# Altium PCB DIOT_Sampler.PCBDOC (part 4 of 8)
Units mm, origin at the board's own origin, x right, y up, seen from the top; angles counter-clockwise.
Board outline 221.17 x 100 mm, 4 copper layers (Top, GP1(GND), L3, Bot), stack 1.648 mm thick; 666 components, 413 nets, 2132 pads, 925 vias.
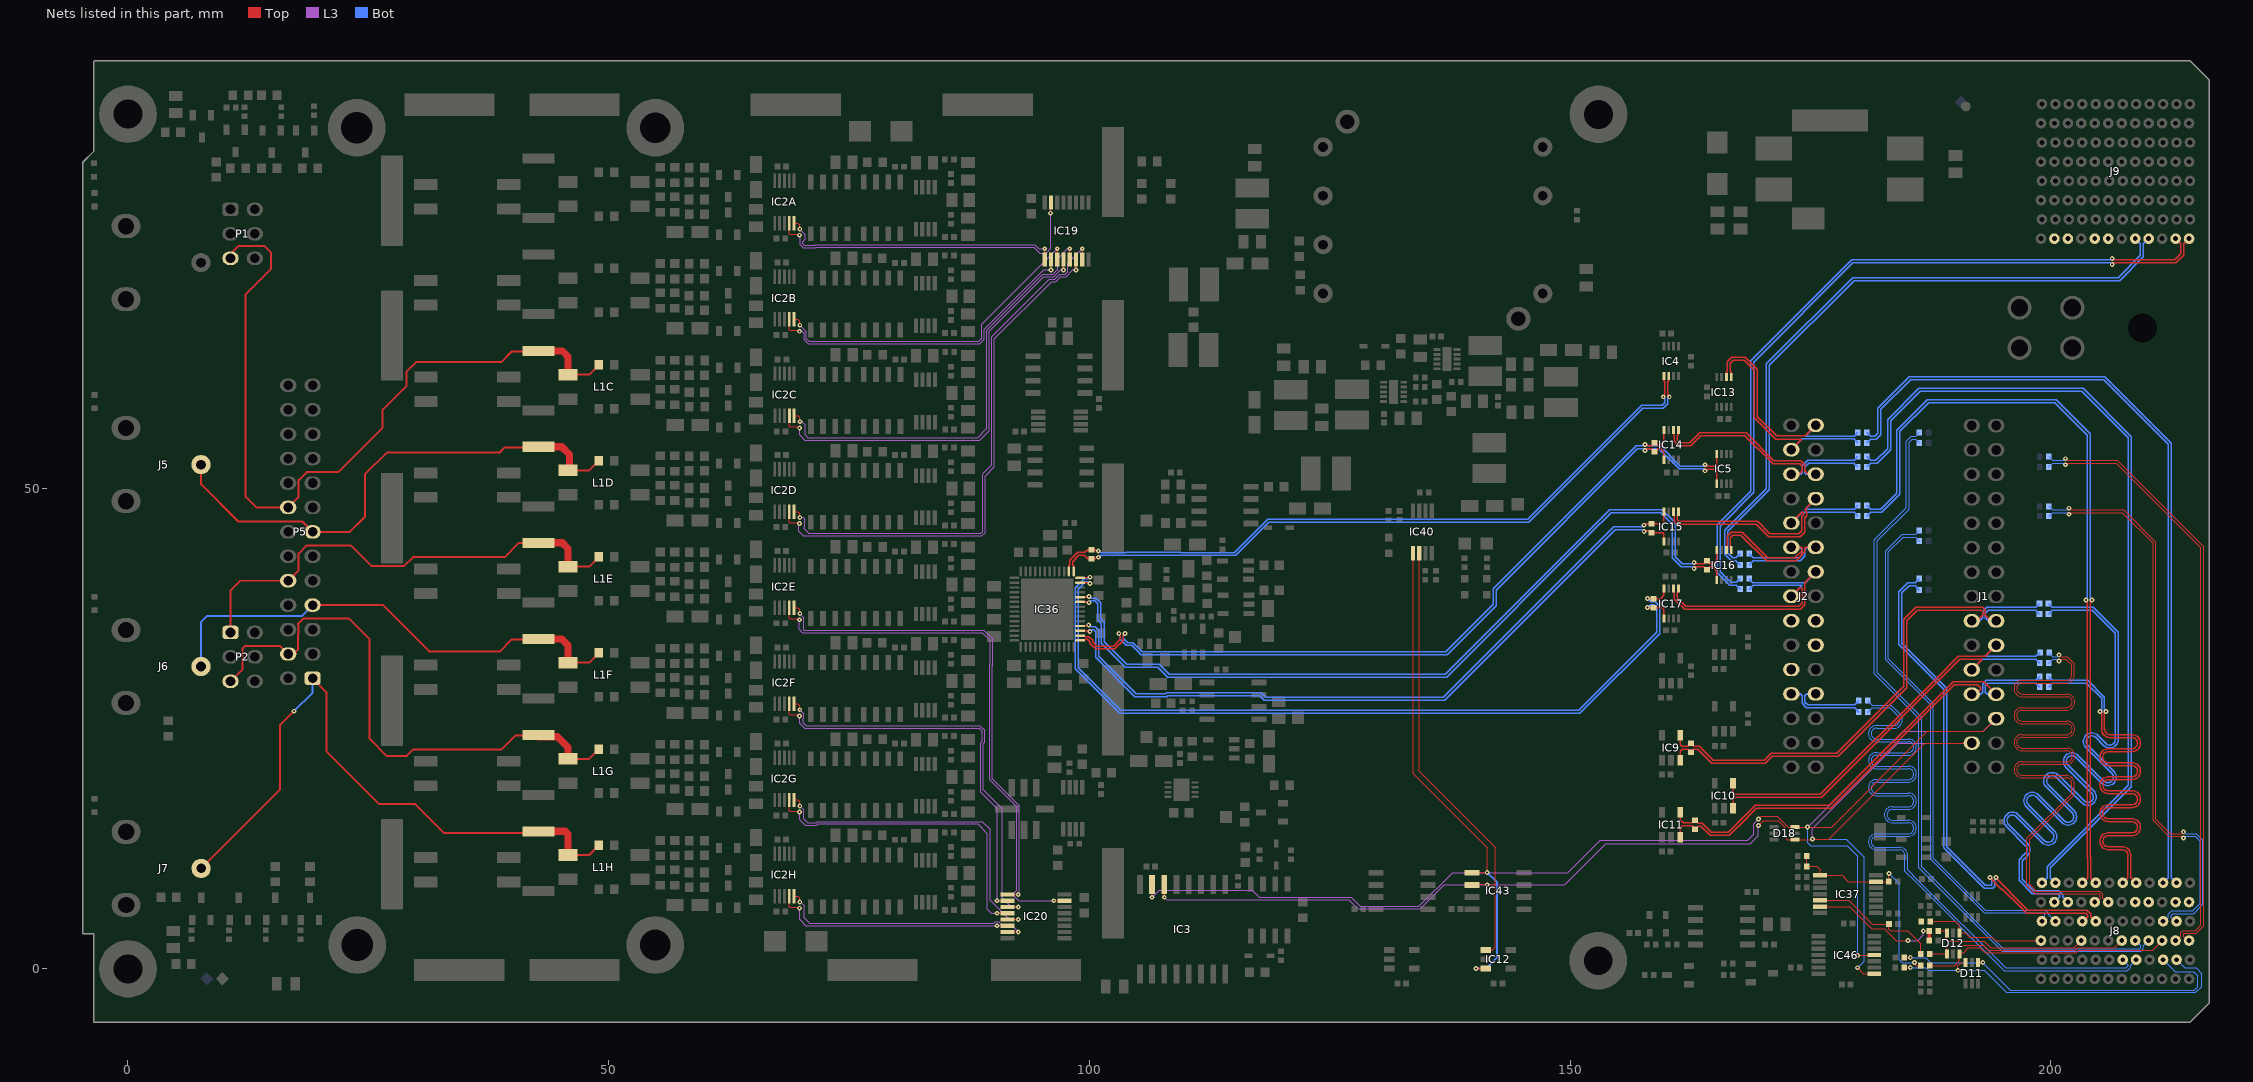
[diagram p5: the nets of this part, all layers, seen from the top]

## Via types
v1: diameter 0.5, hole 0.2, Top to Bot, tented both sides, 704 vias
v2: diameter 0.5, hole 0.2, Top to Bot, 180 vias
v3: diameter 0.6, hole 0.3, Top to Bot, tented both sides, 17 vias
v4: diameter 1, hole 0.6, Top to Bot, tented both sides, 16 vias
v5: diameter 0.6, hole 0.3, Top to Bot, 6 vias
v6: diameter 1.27, hole 0.711, Top to Bot, 2 vias

## Nets (pads, with @x,y where several pads share a name; then routed paths per layer and width w, separated by ;. In a path a pad name is that pad's centre, name@x,y a point inside that pad or via, vN(x,y) a via of type N, cw(c..) or ccw(c..) an arc to the next point about the centre after c; other vN are vias at no path point) (continued)
ADC_IN_P2: L1C.1 P1.5 P5.16 R1C.1 R5C.2 | length 81.8
  Top w0.203: P1.5@10.66,73.91 10.66,74.326 11.534,75.2 14.187,75.2 14.894,74.493 14.894,72.815 12.244,70.165 12.244,49.1 13.354,47.99 P5.16@16.66,47.99 ; P5.16@17.225,47.99 P5.16@16.66,47.99 ; R5C.2@42.707,64.261 42.665,64.219 42.654,64.23 39.944,64.23 38.819,63.105 29.974,63.105 28.958,62.089 28.958,60.619 26.494,58.155 26.494,56.261 21.894,51.661 19.783,51.661 18.576,51.661 17.76,50.845 17.76,49.09 P5.16@16.66,47.99 ; L1C.1@45.773,61.8 47.973,61.8 48.86,62.686 48.86,62.699 R1C.1@48.977,62.816
  Top w0.762: R5C.2@42.707,64.261 45.188,64.261 45.769,63.68 45.769,61.804 L1C.1@45.773,61.8
ADC_IN_P3: J5.1 L1D.1 P5.13 R1D.1 R5D.2 | length 54.4
  Top w0.203: J5.1@7.6,52.45 7.6,50.395 11.445,46.55 18.1,46.55 P5.13@19.2,45.45 23.089,45.45 24.638,46.999 24.638,51.424 26.944,53.73 38.694,53.73 39.194,54.23 42.619,54.23 R5D.2@42.694,54.305 ; L1D.1@45.76,51.844 47.961,51.844 48.847,52.73 48.847,52.743 R1D.1@48.964,52.86
  Top w0.762: R5D.2@42.694,54.305 45.119,54.305 45.919,53.505 45.919,52.003 L1D.1@45.76,51.844
ADC_IN_P4: L1E.1 P2.1 P5.10 R1E.1 R5E.2 | length 50.1
  Top w0.203: P2.1@10.66,34.99 10.66,39.336 11.694,40.37 15.23,40.37 P5.10@16.66,40.37 17.739,41.449 17.739,43.2 18.559,44.02 23.22,44.02 25.32,41.92 28.733,41.92 29.649,42.836 39.175,42.836 40.644,44.305 42.61,44.305 42.652,44.263 R5E.2@42.694,44.305 ; L1E.1@45.76,41.844 47.961,41.844 48.847,42.73 48.847,42.743 R1E.1@48.964,42.86
  Top w0.762: R5E.2@42.694,44.305 45.169,44.305 45.76,43.714 L1E.1@45.76,41.844
ADC_IN_P5: J6.1 L1F.1 P5.7 R1F.1 R5F.2 | length 51.8
  Top w0.203: P5.7@19.2,37.83 20.63,37.83 26.536,37.83 31.316,33.05 31.316,33.008 38.647,33.008 39.902,34.263 42.652,34.263 R5F.2@42.694,34.305 ; L1F.1@45.76,31.844 47.961,31.844 48.847,32.73 48.847,32.743 R1F.1@48.964,32.86
  Top w0.762: R5F.2@42.694,34.305 45.119,34.305 45.76,33.664 L1F.1@45.76,31.844
  Bot w0.203: J6.1@7.6,31.45 7.6,36.1 8.2,36.7 18.07,36.7 P5.7@19.2,37.83
ADC_IN_P6: L1G.1 P2.5 P5.4 R1G.1 R5G.2 | length 59.6
  Top w0.203: P2.5@10.66,29.91 11.93,31.18 11.93,33.335 12.17,33.575 15.835,33.575 P5.4@16.66,32.75 17.2,32.75 17.7,33.25 17.7,34.84 17.714,34.854 17.714,35.726 17.7,35.74 17.7,35.9 18.22,36.42 23,36.42 25.13,34.29 25.13,23.919 26.916,22.133 28.946,22.133 29.649,22.836 38.875,22.836 40.319,24.28 42.669,24.28 R5G.2@42.694,24.305 ; L1G.1@45.894,21.844 47.961,21.844 48.847,22.73 48.847,22.743 R1G.1@48.964,22.86
  Top w0.762: R5G.2@42.669,24.142 44.679,24.142 45.76,23.061 45.76,21.978 45.894,21.844 L1G.1@45.76,21.844
ADC_IN_P7: J7.1 L1H.1 P5.1 R1H.1 R5H.2 | length 67.3
  Top w0.203: J7.1@7.605,10.45 15.83,18.675 15.83,25.37 v2(17.26,26.8) ; P5.1@19.2,30.21 20.63,28.78 20.63,22.619 26.119,17.13 29.886,17.13 32.861,14.155 R5H.2@42.694,14.155 ; L1H.1@45.76,11.844 47.961,11.844 48.847,12.73 48.847,12.743 R1H.1@48.964,12.86
  Top w0.762: R5H.2@42.694,14.305 45.469,14.305 45.769,14.005 45.769,11.853 L1H.1@45.76,11.844
  Bot w0.203: v2(17.26,26.8) 19.2,28.74 P5.1@19.2,30.21
ADC_SCK_N: IC4.5 IC36.42 R79.1 | length 73.1
  Top w0.152: IC36.42@97.864,41.34 97.864,41.942 97.962,42.039 97.962,42.492 98.778,43.308 99.516,43.308 99.808,43.6 R79.1@100.194,43.6 100.58,43.6 100.711,43.469 v1(100.917,43.469) ; v2(159.686,59.5) 159.847,59.661 159.847,61.051 159.75,61.149 IC4.5@159.75,61.65
  Bot w0.152: v1(100.917,43.469) 101.011,43.469 101.174,43.306 103.759,43.306 103.78,43.327 109.522,43.327 109.544,43.306 115.086,43.306 118.53,46.75 145.575,46.75 157.45,58.625 159.572,58.625 159.847,58.9 159.847,59.339 v2(159.686,59.5)
ADC_SCK_P: IC4.6 IC36.41 R79.2 | length 73.1
  Top w0.152: IC36.41@98.364,41.34 98.364,41.942 98.266,42.039 98.266,42.365 98.904,43.003 99.465,43.003 99.808,42.66 R79.2@100.194,42.66 100.58,42.66 100.737,42.817 v1(100.944,42.817) ; IC4.6@160.25,61.65 160.25,61.149 160.152,61.051 160.152,59.661 v2(160.313,59.5)
  Bot w0.152: v1(100.944,42.817) 101.023,42.817 101.207,43.001 103.885,43.001 103.906,43.022 109.396,43.022 109.417,43.001 115.212,43.001 118.656,46.445 145.701,46.445 157.576,58.32 159.698,58.32 160.152,58.774 160.152,59.339 v2(160.313,59.5)
ADC_SDOA_N: IC5.1 IC14.1 IC36.28 R21.1 | length 84.7
  Top w0.152: IC36.28@99.039,34.665 99.465,34.665 99.563,34.568 99.919,34.568 100.326,34.161 100.326,34.018 100.764,33.58 102.52,33.58 103.219,34.279 103.219,34.68 103.058,34.841 v1(103.058,34.879) ; v2(157.775,53.927) 157.936,54.088 158.472,54.088 R21.1@158.79,53.771 158.811,53.792 158.831,53.792 159.045,54.006 159.045,54.02 159.134,54.109 159.44,54.109 159.75,53.8 IC14.1@159.75,52.95 ; v2(164.035,51.804) 164.035,51.825 164.175,51.965 165.089,51.965 165.255,51.799 165.255,50.455 IC5.1@165.25,50.45
  Bot w0.152: v1(103.058,34.879) 103.058,34.785 103.219,34.624 103.219,34.274 103.854,33.639 104.384,33.639 105.159,32.864 105.352,32.671 137.202,32.671 142.305,37.774 142.305,39.405 156.999,54.099 ; 157.009,54.088 157.614,54.088 v2(157.775,53.927) 157.936,54.088 159.235,54.088 161.331,51.993 163.846,51.993 v2(164.035,51.804)
ADC_SDOA_P: IC5.8 IC14.8 IC36.27 R21.2 | length 84.9
  Top w0.152: IC36.27@99.039,34.165 99.465,34.165 99.563,34.263 99.793,34.263 100.021,34.035 100.021,33.892 100.258,33.655 100.638,33.275 102.646,33.275 103.524,34.153 103.524,34.68 103.685,34.841 v1(103.685,34.879) ; v2(157.775,54.554) 157.936,54.393 158.472,54.393 R21.2@158.79,54.711 ; R21.2@158.847,54.613 R21.2@158.847,54.696 ; R21.2@158.898,54.665 159.045,54.518 159.045,54.503 159.134,54.414 159.434,54.414 159.75,54.73 IC14.8@159.75,56.05 ; v2(164.035,52.431) 164.035,52.41 164.175,52.27 165.089,52.27 165.255,52.436 165.255,53.545 IC5.8@165.25,53.55
  Bot w0.152: v1(103.685,34.879) 103.685,34.785 103.524,34.624 103.524,34.4 103.98,33.944 104.51,33.944 105.182,33.272 105.479,32.976 137.076,32.976 142,37.9 142,39.531 156.883,54.414 157.635,54.414 v2(157.775,54.554) 157.936,54.393 159.361,54.393 161.457,52.298 163.902,52.298 v2(164.035,52.431)
ADC_SDOB_N: IC15.8 IC36.30 R22.2 | length 74.3
  Top w0.152: IC36.30@99.039,35.665 99.968,35.665 99.924,35.709 v1(99.924,35.757) ; v1(157.682,46.145) 157.819,46.283 158.537,46.283 158.626,46.194 158.715,46.283 159.583,46.283 159.75,46.45 IC15.8@159.75,47.55
  Bot w0.152: v1(99.924,35.757) 100.006,35.757 100.187,35.575 100.581,35.575 100.955,35.201 100.955,32.53 104.861,28.624 107.924,28.624 108.013,28.713 117.868,28.713 117.957,28.624 118.331,28.25 136.825,28.25 154.55,45.975 157.511,45.975 v1(157.682,46.145)
ADC_SDOB_P: IC15.1 IC36.29 R22.1 | length 74
  Top w0.152: IC36.29@99.039,35.165 99.968,35.165 v1(100.044,35.089) ; v1(157.7,45.5) 157.748,45.548 158.509,45.548 158.715,45.343 158.722,45.35 159.65,45.35 159.75,45.25 IC15.1@159.75,44.45
  L3 w0.152: v1(100.044,35.089) v1@100.044,35.263
  Bot w0.152: v1(100.044,35.089) 100.126,35.089 100.307,35.271 100.454,35.271 100.65,35.075 100.65,32.404 104.734,28.319 108.05,28.319 108.14,28.408 117.742,28.408 118.205,27.945 136.951,27.945 154.676,45.67 157.53,45.67 v1(157.7,45.5)
ADC_SDOC_N: IC16.8 IC36.36 R23.2 | length 84.8
  Top w0.152: IC36.36@99.039,38.665 99.893,38.665 v1(99.969,38.742) ; v2(162.9,42.279) 163.061,42.118 163.909,42.118 R23.2@164.226,42.435 164.544,42.118 164.8,42.118 165.25,42.568 IC16.8@165.25,43.55
  Bot w0.152: v1(99.969,38.742) 100.143,38.568 100.676,38.568 101.163,38.081 101.163,36.462 101.3,36.325 101.539,36.086 101.539,34.011 103.875,31.675 107.256,31.675 108.281,30.65 137.025,30.65 151.8,45.425 154.13,47.755 159.536,47.755 160.907,46.383 160.907,42.874 161.663,42.118 162.739,42.118 v2(162.9,42.279)
ADC_SDOC_P: IC16.1 IC36.35 R23.1 | length 84.7
  Top w0.152: IC36.35@99.039,38.165 99.64,38.165 99.649,38.174 99.884,38.174 v1(99.969,38.089) ; v2(162.9,41.652) 163.061,41.813 163.909,41.813 R23.1@164.226,41.495 164.544,41.813 164.8,41.813 165.25,41.362 IC16.1@165.25,40.45
  Bot w0.152: v1(99.969,38.089) 100.143,38.263 100.55,38.263 100.859,37.954 100.859,36.335 101.234,35.96 101.234,33.885 103.749,31.37 107.13,31.37 108.155,30.345 137.151,30.345 152.105,45.299 154.256,47.45 159.409,47.45 160.602,46.257 160.602,42.748 161.537,41.813 162.739,41.813 v2(162.9,41.652)
ADC_SDOD_N: IC17.8 IC36.40 R24.2 | length 84.6
  Top w0.152: IC36.40@99.039,40.665 99.988,40.665 v1(100.064,40.742) ; v1(158.05,38.511) R24.2@158.671,38.511 159.409,38.511 159.75,38.852 IC17.8@159.75,39.55
  Bot w0.152: v1(100.064,40.742) 99.975,40.742 99.801,40.568 99.459,40.568 98.512,39.621 98.512,31.202 103.131,26.583 148.914,26.583 151.014,26.583 159.305,34.874 159.305,37.183 159.305,37.72 158.832,38.193 158.368,38.193 v1(158.05,38.511)
ADC_SDOD_P: IC17.1 IC36.39 R24.1 | length 82.8
  Top w0.152: IC36.39@99.039,40.165 99.988,40.165 v1(100.064,40.089) ; v1(158.05,37.571) R24.1@158.671,37.571 159.579,37.571 159.75,37.4 IC17.1@159.75,36.45
  Bot w0.152: v1(100.064,40.089) 99.975,40.089 99.801,40.263 99.585,40.263 98.817,39.495 98.817,31.328 103.257,26.888 148.788,26.888 150.888,26.888 159,35 159,37.594 158.705,37.889 158.368,37.889 v1(158.05,37.571)
BGA0: D12.6 J8.C3 R90.2 | length 26
  Top w0.127: R90.2@187.44,0.35 189.98,0.35 190.48,0.85 D12.6@190.48,1.55 190.632,1.701 190.922,1.701 191.417,2.196 192.68,2.196 193.174,1.701 202.639,1.701 202.893,1.955 210.575,1.955 J8.C3@211.569,2.95
BGA1: D12.4 J8.F3 R91.2 | length 21.3
  Top w0.127: R91.2@187.4,1.55 D12.4@189.18,1.55 189.18,2.2 189.43,2.45 192.99,2.45 193.484,1.955 202.534,1.955 202.788,2.209 206.629,2.209 J8.F3@207.369,2.95
BGA2: D12.3 J8.I3 R94.2 | length 16.3
  Top w0.127: R94.2@188.36,3.95 189.104,3.95 D12.3@189.242,3.812 ; D12.3@189.18,3.75 189.18,3.074 189.404,2.85 193.081,2.85 193.721,2.209 202.429,2.209 J8.I3@203.169,2.95
BGA3: D12.1 J8.L3 R99.2 | length 12.8
  Top w0.127: R99.2@187.44,4.95 190.079,4.95 190.48,4.549 D12.1@190.48,3.75 191.069,3.75 191.544,3.275 193.927,3.275 194.252,2.95 J8.L3@198.969,2.95
BP_I2C.SCL: D11.3 J8.B2 R121.1 | length 38.3
  Top w0.127: R121.1@184.733,0.141 v2(185.381,0.141) ; v2(190.329,-0.15) 190.329,0.325 190.654,0.65 D11.3@191.13,0.65
  Bot w0.127: v2(185.381,0.141) 186.99,0.141 187.281,-0.15 v2(190.329,-0.15) 193.05,-0.15 195.354,-2.454 196.381,-2.454 215.015,-2.454 215.069,-2.4 215.141,-2.4 215.7,-1.841 215.7,-0.5 215.1,0.1 213.919,0.1 J8.B2@213.069,0.95
BP_I2C.SDA: D11.1 J8.C2 R120.1 | length 38
  Top w0.127: R120.1@184.733,1.182 v2(185.381,1.182) ; D11.1@192.43,0.65 v2(192.92,0.65)
  Bot w0.127: v2(185.381,1.182) 186.999,1.182 187.532,0.65 v2(192.92,0.65) 195.77,-2.2 214.91,-2.2 215.269,-1.841 215.269,-0.7 214.869,-0.3 212.919,-0.3 J8.C2@211.669,0.95
BP_IO.LVDS_N0: J8.E3 R138.1 | length 76.2
  Bot w0.127: R138.1@186.33,54.7 185.92,55.11 185.6,55.11 185.25,54.76 185.25,47.83 181.929,44.509 181.929,30.816 186.55,26.195 186.55,10.62 195.07,2.1 209.229,2.1 209.329,2.2 209.329,2.39 J8.E3@208.769,2.95
BP_IO.LVDS_N1: J8.B3 R139.1 | length 62.6
  Top w0.127: v2(201.513,52.437) 201.687,52.61 206.79,52.61 215.6,43.8 215.6,4.561 215.018,3.979 213.693,3.979 213.529,3.816 213.529,3.339 213.14,2.95 J8.B3@212.969,2.95
  Bot w0.127: R139.1@199.77,52.2 200.18,52.61 201.34,52.61 v2(201.513,52.437)
BP_IO.LVDS_N2: J8.C4 R140.1 | length 58.6
  Top w0.127: v2(201.9,47.286) 202.074,47.46 207.44,47.46 210.625,44.275 210.625,15.459 212.284,13.8 213.626,13.8 v2(213.8,13.626)
  Bot w0.127: R140.1@199.77,47.05 200.18,47.46 201.726,47.46 v2(201.9,47.286) ; J8.C4@211.669,4.95 211.84,4.95 212.229,5.339 212.229,5.694 212.564,6.029 214.75,6.029 215.541,6.82 215.541,13.259 215,13.8 213.974,13.8 v2(213.8,13.626)
BP_IO.LVDS_N3: J8.L4 R141.1 | length 53.5
  Bot w0.127: R141.1@186.33,45.6 185.92,45.19 184.54,45.19 182.825,43.475 182.825,32.15 187.496,27.479 187.496,11.409 193.084,5.821 199.314,5.821 199.382,5.752 199.382,5.263 J8.L4@199.069,4.95
BP_IO.LVDS_N4: J8.I4 R142.1 | length 50.5
  Top w0.152: v2(193.673,9.5) 193.673,9.486 194.856,8.303 194.966,8.303 196.905,6.364 197.47,5.8 203.617,5.8 203.817,5.6 203.817,5.399 203.368,4.95 J8.I4@203.269,4.95
  Bot w0.152: R142.1@186.33,39.4 185.882,39.848 185.248,39.848 184.5,39.1 184.5,33.875 189.175,29.2 189.175,12.725 193.2,8.7 193.834,8.7 193.834,9.339 v2(193.673,9.5)
BP_IO.LVDS_N5: J8.K5 R143.1 | length 85.8
  Bot w0.152: R143.1@199.755,36.9 200.152,37.298 204.296,37.298 206.7,34.894 206.7,26.445 206.7,23.853 cw(c206.124,23.853) 205.716,23.445 204.874,24.287 ccw(c204.251,23.664) 203.629,24.288 203.628,24.287 ccw(c204.251,23.664) 203.629,23.041 206.321,20.349 cw(c205.914,19.942) 206.321,19.534 cw(c205.914,19.942) 205.506,19.534 202.814,22.227 ccw(c202.191,21.604) 201.568,22.227 ccw(c202.191,21.604) 201.568,20.981 204.26,18.288 cw(c203.853,17.881) 204.26,17.473 cw(c203.853,17.881) 203.445,17.473 200.753,20.166 ccw(c200.13,19.543) 199.507,20.166 ccw(c200.13,19.543) 199.507,18.92 202.199,16.227 cw(c201.792,15.82) 202.199,15.413 cw(c201.792,15.82) 201.385,15.413 198.692,18.105 ccw(c198.069,17.482) 197.446,18.105 ccw(c198.069,17.482) 197.446,16.859 200.139,14.167 cw(c199.731,13.759) 200.139,13.352 cw(c199.731,13.759) 199.324,13.352 196.631,16.044 ccw(c196.008,15.421) 195.386,16.045 195.385,16.043 ccw(c196.008,15.421) 195.385,14.798 197.359,12.824 cw(c196.952,12.417) 197.359,12.009 197.198,11.848 196.7,11.35 196.7,9.2 198.085,7.815 200.702,7.815 200.917,7.6 200.917,7.498 J8.K5@200.369,6.95
BP_IO.LVDS_N6: J8.H5 R144.1 | length 80.3
  Top w0.127: v2(200.858,32.037) 201.032,32.21 201.585,32.21 201.676,32.119 202.158,31.638 202.158,30.559 cw(c201.594,30.559) 201.594,29.996 197.011,29.996 ccw(c197.011,29.153) 196.168,29.153 ccw(c197.011,29.153) 197.011,28.31 201.645,28.31 cw(c201.645,27.746) 202.208,27.746 cw(c201.645,27.746) 201.645,27.183 197.011,27.183 ccw(c197.011,26.34) 196.168,26.34 ccw(c197.011,26.34) 197.011,25.497 201.645,25.497 cw(c201.645,24.934) 202.208,24.934 cw(c201.645,24.934) 201.645,24.37 197.011,24.37 ccw(c197.011,23.527) 196.168,23.527 ccw(c197.011,23.527) 197.011,22.684 201.645,22.684 cw(c201.645,22.121) 202.208,22.121 cw(c201.645,22.121) 201.645,21.557 197.011,21.557 ccw(c197.011,20.714) 196.168,20.714 ccw(c197.011,20.714) 197.011,19.872 201.594,19.872 cw(c201.594,19.308) 202.158,19.308 202.158,19.105 202.158,18.236 197.5,13.578 197.5,8.671 198.356,7.815 199.03,7.815 204.958,7.815 205.129,7.644 205.129,7.369 204.71,6.95 J8.H5@204.569,6.95
  Bot w0.127: R144.1@199.77,31.8 200.18,32.21 200.684,32.21 v2(200.858,32.037)
BP_IO.LVDS_N7: J8.F6 R145.1 | length 54.3
  Top w0.152: v2(205.109,26.775) 205.27,26.614 205.27,26.565 205.27,24.942 ccw(c206.151,24.942) 206.151,24.061 208.44,24.061 cw(c208.44,23.485) 209.016,23.485 cw(c208.44,23.485) 208.44,22.909 205.981,22.909 ccw(c205.981,22.028) 205.1,22.028 ccw(c205.981,22.028) 205.981,21.147 208.44,21.147 cw(c208.44,20.571) 209.016,20.571 cw(c208.44,20.571) 208.44,19.994 205.981,19.994 ccw(c205.981,19.113) 205.1,19.113 ccw(c205.981,19.113) 205.981,18.232 208.44,18.232 cw(c208.44,17.656) 209.016,17.656 cw(c208.44,17.656) 208.44,17.08 205.981,17.08 ccw(c205.981,16.199) 205.1,16.199 ccw(c205.981,16.199) 205.981,15.318 208.44,15.318 cw(c208.44,14.742) 209.016,14.742 cw(c208.44,14.742) 208.44,14.166 205.981,14.166 ccw(c205.981,13.285) 205.1,13.285 ccw(c205.981,13.285) 205.981,12.404 207.424,12.404 cw(c207.424,11.827) 208,11.827 208,11.599 208,9.481 J8.F6@207.469,8.95
  Bot w0.152: R145.1@199.77,29.3 200.168,29.698 203.704,29.698 205.27,28.132 205.27,26.936 v2(205.109,26.775)
BP_IO.LVDS_N8: J8.C6 R146.1 | length 84.2
  Bot w0.152: R146.1@180.87,54.7 181.268,55.098 181.829,55.098 182.305,55.574 182.305,58.205 185.4,61.3 205.475,61.3 212.217,54.558 212.217,9.498 J8.C6@211.669,8.95
BP_IO.LVDS_N9: J8.L6 R147.1 | length 84.2
  Bot w0.152: R147.1@180.87,52.2 181.268,52.598 181.929,52.598 183.325,53.994 183.325,57 186.395,60.07 203.224,60.07 208.05,55.244 208.05,19.081 199.617,10.648 199.617,9.498 J8.L6@199.069,8.95
BP_IO.LVDS_N10: J8.I6 R148.1 | length 80
  Top w0.152: J8.I6@203.269,8.95 203.817,9.498 203.817,11.5 203.8,11.517 203.8,26 203.8,38.214 v2(203.639,38.375)
  Bot w0.152: R148.1@180.87,47.1 181.268,47.498 182.429,47.498 184.275,49.344 184.275,55.9 187.275,58.9 200.425,58.9 203.8,55.525 203.8,42.281 203.8,39.875 203.8,38.536 v2(203.639,38.375)
BP_IO.LVDS_N11: J9.E1 R149.1 | length 69.2
  Bot w0.152: R149.1@167.674,42 167.226,42.448 166.774,42.448 166.095,43.126 166.095,45.626 170.42,49.951 170.42,62.92 179.4,71.9 207.017,71.9 209.317,74.2 209.317,75.402 J9.E1@208.769,75.95
BP_IO.LVDS_N12: J9.B1 R150.1 | length 77.9
  Top w0.152: v2(206.375,73.891) 206.536,73.73 212.871,73.73 213.517,74.375 213.517,75.402 J9.B1@212.969,75.95
  Bot w0.152: R150.1@167.674,39.5 167.597,39.576 167.597,39.6 167.3,39.898 166.596,39.898 165.296,41.198 165.296,46.177 168.8,49.681 168.8,63.238 179.292,73.73 206.225,73.73 206.375,73.88 v2(206.375,73.891)
BP_IO.LVDS_N13: J9.K1
BP_IO.LVDS_N14: J9.H1
BP_IO.LVDS_N15: J8.F2 R153.1 | length 83.8
  Bot w0.127: R153.1@180.97,27.9 181.43,27.44 183.355,27.44 183.794,27.002 184.321,26.474 cw(c183.725,25.878) 183.725,25.036 181.866,25.036 ccw(c181.866,24.472) 181.303,24.472 ccw(c181.866,24.472) 181.866,23.909 185.174,23.909 cw(c185.174,23.066) 186.017,23.066 cw(c185.174,23.066) 185.174,22.223 181.866,22.223 ccw(c181.866,21.659) 181.303,21.659 ccw(c181.866,21.659) 181.866,21.096 185.174,21.096 cw(c185.174,20.253) 186.017,20.253 cw(c185.174,20.253) 185.174,19.41 181.866,19.41 ccw(c181.866,18.846) 181.303,18.846 ccw(c181.866,18.846) 181.866,18.283 185.174,18.283 cw(c185.174,17.44) 186.017,17.44 cw(c185.174,17.44) 185.174,16.597 183.513,16.597 ccw(c183.513,16.034) 182.95,16.034 ccw(c183.513,16.034) 183.513,15.47 185.174,15.47 cw(c185.174,14.627) 186.017,14.627 cw(c185.174,14.627) 185.174,13.784 181.866,13.784 ccw(c181.866,13.221) 181.303,13.221 ccw(c181.866,13.221) 181.866,12.657 184.257,12.657 cw(c184.257,11.814) 185.1,11.814 185.1,10.285 186.179,9.205 195.285,0.1 207.829,0.1 208.029,0.3 208.029,0.39 J8.F2@207.469,0.95
BP_IO.LVDS_P0: J8.D3 R122.1 | length 77.5
  Bot w0.127: R122.1@186.33,55.8 185.92,55.39 185.484,55.39 184.971,54.876 184.971,47.946 181.65,44.625 181.65,30.7 186.271,26.079 186.271,10.504 194.954,1.821 209.345,1.821 209.609,2.084 209.609,2.39 J8.D3@210.169,2.95
BP_IO.LVDS_P1: J8.A3 R123.1 | length 63.1
  Top w0.127: v2(201.513,53.064) 201.687,52.89 206.905,52.89 215.798,43.998 215.879,43.916 215.879,4.445 215.798,4.364 215.134,3.7 213.809,3.7 213.809,3.339 214.198,2.95 J8.A3@214.369,2.95
  Bot w0.127: R123.1@199.77,53.3 200.18,52.89 200.9,52.89 201.34,52.89 v2(201.513,53.064)
BP_IO.LVDS_P2: J8.B4 R124.1 | length 59
  Top w0.127: v2(201.9,47.913) 202.074,47.74 207.555,47.74 210.905,44.39 210.905,15.575 212.4,14.079 213.626,14.079 v2(213.8,14.253)
  Bot w0.127: R124.1@199.77,48.15 200.18,47.74 201.726,47.74 v2(201.9,47.913) ; J8.B4@213.069,4.95 212.898,4.95 212.509,5.339 212.509,5.579 212.68,5.75 214.866,5.75 215.821,6.705 215.821,13.375 215.198,13.998 215.116,14.079 213.974,14.079 v2(213.8,14.253)
BP_IO.LVDS_P3: J8.K4 R125.1 | length 53.3
  Bot w0.127: R125.1@186.33,44.5 185.92,44.91 184.655,44.91 183.104,43.359 183.104,32.266 187.775,27.595 187.775,11.525 193.2,6.1 199.43,6.1 199.58,5.95 199.661,5.868 199.661,5.758 J8.K4@200.469,4.95
BP_IO.LVDS_P4: J8.H4 R126.1 | length 51.8
  Top w0.152: v2(194.3,9.5) 194.3,9.4 197.12,6.58 197.596,6.104 203.743,6.104 204.121,5.726 204.121,5.399 204.57,4.95 J8.H4@204.669,4.95
  Bot w0.152: R126.1@186.33,40.6 185.882,40.152 185.122,40.152 184.196,39.226 184.196,33.749 188.871,29.074 188.871,12.599 193.074,8.396 193.96,8.396 194.139,8.574 194.139,9.339 v2(194.3,9.5)
BP_IO.LVDS_P5: J8.J5 R127.1 | length 86.3
  Bot w0.152: R127.1@199.755,38 200.152,37.602 204.423,37.602 207.005,35.02 207.005,26.141 207.005,23.853 cw(c206.124,23.853) 205.5,23.231 204.659,24.072 ccw(c204.251,23.664) 203.844,23.257 206.537,20.565 cw(c205.914,19.942) 206.536,19.319 cw(c205.914,19.942) 205.291,19.319 202.598,22.011 ccw(c202.191,21.604) 201.783,22.011 ccw(c202.191,21.604) 201.783,21.196 204.476,18.504 cw(c203.853,17.881) 204.476,17.258 cw(c203.853,17.881) 203.23,17.258 200.537,19.95 ccw(c200.13,19.543) 199.722,19.95 ccw(c200.13,19.543) 199.722,19.135 202.415,16.443 cw(c201.792,15.82) 202.415,15.197 cw(c201.792,15.82) 201.169,15.197 198.477,17.889 ccw(c198.069,17.482) 197.662,17.889 ccw(c198.069,17.482) 197.662,17.075 200.354,14.382 cw(c199.731,13.759) 200.354,13.136 cw(c199.731,13.759) 199.108,13.136 196.416,15.829 ccw(c196.008,15.421) 195.601,15.014 197.575,13.04 cw(c196.952,12.417) 197.575,11.794 197.413,11.632 197.005,11.224 197.005,9.326 198.211,8.12 200.828,8.12 201.221,7.726 201.221,7.498 J8.J5@201.769,6.95
BP_IO.LVDS_P6: J8.G5 R128.1 | length 80.8
  Top w0.127: v2(200.858,32.664) 201.032,32.49 201.701,32.49 202.071,32.119 202.437,31.753 202.437,30.559 cw(c201.594,30.559) 201.594,29.716 197.011,29.716 ccw(c197.011,29.153) 196.447,29.153 ccw(c197.011,29.153) 197.011,28.589 201.645,28.589 cw(c201.645,27.746) 202.487,27.746 cw(c201.645,27.746) 201.645,26.904 197.011,26.904 ccw(c197.011,26.34) 196.447,26.34 ccw(c197.011,26.34) 197.011,25.777 201.645,25.777 cw(c201.645,24.934) 202.487,24.934 cw(c201.645,24.934) 201.645,24.091 197.011,24.091 ccw(c197.011,23.527) 196.447,23.527 ccw(c197.011,23.527) 197.011,22.964 201.645,22.964 cw(c201.645,22.121) 202.487,22.121 cw(c201.645,22.121) 201.645,21.278 197.011,21.278 ccw(c197.011,20.714) 196.447,20.714 ccw(c197.011,20.714) 197.011,20.151 201.594,20.151 cw(c201.594,19.308) 202.437,19.308 202.437,19.105 202.437,18.12 197.779,13.462 197.779,8.786 198.471,8.094 205.074,8.094 205.155,8.013 205.409,7.759 205.409,7.369 205.828,6.95 J8.G5@205.969,6.95
  Bot w0.127: R128.1@199.77,32.9 200.18,32.49 200.684,32.49 v2(200.858,32.664)
BP_IO.LVDS_P7: J8.E6 R129.1 | length 54.8
  Top w0.152: v2(205.736,26.775) 205.575,26.614 205.575,26.565 205.575,24.942 ccw(c206.151,24.942) 206.151,24.366 208.44,24.366 cw(c208.44,23.485) 209.321,23.485 cw(c208.44,23.485) 208.44,22.604 205.981,22.604 ccw(c205.981,22.028) 205.404,22.028 ccw(c205.981,22.028) 205.981,21.452 208.44,21.452 cw(c208.44,20.571) 209.321,20.571 cw(c208.44,20.571) 208.44,19.69 205.981,19.69 ccw(c205.981,19.113) 205.404,19.113 ccw(c205.981,19.113) 205.981,18.537 208.44,18.537 cw(c208.44,17.656) 209.321,17.656 cw(c208.44,17.656) 208.44,16.775 205.981,16.775 ccw(c205.981,16.199) 205.404,16.199 ccw(c205.981,16.199) 205.981,15.623 208.44,15.623 cw(c208.44,14.742) 209.321,14.742 cw(c208.44,14.742) 208.44,13.861 205.981,13.861 ccw(c205.981,13.285) 205.404,13.285 ccw(c205.981,13.285) 205.981,12.708 207.424,12.708 cw(c207.424,11.827) 208.305,11.827 208.305,11.599 208.305,9.514 J8.E6@208.869,8.95
  Bot w0.152: R129.1@199.77,30.4 200.168,30.002 203.83,30.002 205.575,28.258 205.575,26.936 v2(205.736,26.775)
BP_IO.LVDS_P8: J8.B6 R130.1 | length 84.8
  Bot w0.152: R130.1@180.87,55.8 181.268,55.402 181.702,55.402 182,55.7 182,58.331 185.274,61.605 205.601,61.605 212.521,54.685 212.521,9.498 J8.B6@213.069,8.95
BP_IO.LVDS_P9: J8.K6 R131.1 | length 84.7
  Bot w0.152: R131.1@180.87,53.3 181.268,52.902 181.802,52.902 183.02,54.12 183.02,57.126 186.269,60.375 203.35,60.375 208.355,55.37 208.355,18.955 199.921,10.521 199.921,9.498 J8.K6@200.469,8.95
BP_IO.LVDS_P10: J8.H6 R132.1 | length 80.5
  Top w0.152: v2(204.266,38.375) 204.105,38.214 204.105,25.874 204.105,11.643 204.121,11.626 204.121,9.498 J8.H6@204.669,8.95
  Bot w0.152: R132.1@180.87,48.2 181.268,47.802 182.302,47.802 183.97,49.47 183.97,56.026 187.149,59.205 200.551,59.205 204.105,55.651 204.105,42.155 204.105,39.553 204.105,38.536 v2(204.266,38.375)
BP_IO.LVDS_P11: J9.D1 R133.1 | length 68.7
  Bot w0.152: R133.1@167.674,43.2 167.226,42.752 166.9,42.752 166.4,43.252 166.4,45.5 170.725,49.825 170.725,62.794 179.526,71.595 207.143,71.595 209.621,74.074 209.621,75.402 J9.D1@210.169,75.95
BP_IO.LVDS_P12: J9.A1 R134.1 | length 77.4
  Top w0.152: v2(206.375,73.264) 206.536,73.425 212.998,73.425 213.821,74.249 213.821,75.402 J9.A1@214.369,75.95
  Bot w0.152: R134.1@167.674,40.6 167.597,40.524 167.597,40.5 167.3,40.202 166.723,40.202 165.6,41.325 165.6,46.05 169.105,49.555 169.105,63.112 179.418,73.425 206.225,73.425 206.375,73.275 v2(206.375,73.264)
BP_IO.LVDS_P13: J9.J1
BP_IO.LVDS_P14: J9.G1
BP_IO.LVDS_P15: J8.E2 R137.1 | length 84.2
  Bot w0.127: R137.1@180.97,26.7 181.43,27.16 183.24,27.16 183.398,27.002 184.123,26.277 cw(c183.725,25.878) 183.725,25.315 181.866,25.315 ccw(c181.866,24.472) 181.023,24.472 ccw(c181.866,24.472) 181.866,23.629 185.174,23.629 cw(c185.174,23.066) 185.737,23.066 cw(c185.174,23.066) 185.174,22.502 181.866,22.502 ccw(c181.866,21.659) 181.023,21.659 ccw(c181.866,21.659) 181.866,20.816 185.174,20.816 cw(c185.174,20.253) 185.737,20.253 cw(c185.174,20.253) 185.174,19.689 181.866,19.689 ccw(c181.866,18.846) 181.023,18.846 ccw(c181.866,18.846) 181.866,18.004 185.174,18.004 cw(c185.174,17.44) 185.737,17.44 cw(c185.174,17.44) 185.174,16.877 183.513,16.877 ccw(c183.513,16.034) 182.67,16.034 ccw(c183.513,16.034) 183.513,15.191 185.174,15.191 cw(c185.174,14.627) 185.737,14.627 cw(c185.174,14.627) 185.174,14.064 181.866,14.064 ccw(c181.866,13.221) 181.023,13.221 ccw(c181.866,13.221) 181.866,12.378 184.257,12.378 cw(c184.257,11.814) 184.821,11.814 184.821,10.169 185.84,9.15 195.169,-0.179 207.945,-0.179 208.309,0.184 208.309,0.39 J8.E2@208.869,0.95
BP_MGT_Rx_N: J8.E5
BP_MGT_Rx_P: J8.D5
BP_MGT_Tx_N: J8.B5
BP_MGT_Tx_P: J8.A5
CH0_A0: IC2A.4 IC19.15 | length 35.2
  Top w0.127: IC2A.4@68.775,77.567 68.775,76.458 68.825,76.408 69.754,76.408 v1(69.85,76.312) ; IC19.15@95.927,79.62 IC19.15@96.004,79.697 96.004,78.657 v1(95.944,78.597)
  L3 w0.127: v1(69.85,76.312) 69.934,76.397 69.934,75.73 69.919,75.715 69.919,75.302 70.211,75.01 71.573,75.01 71.608,75.045 94.229,75.045 94.844,74.43 95.377,74.43 95.405,74.459 95.536,74.459 96.004,74.926 96.004,78.657 v1(95.944,78.597)
CH0_A1: IC2A.5 IC19.1 | length 29.5
  Top w0.127: IC2A.5@69.275,77.567 69.688,77.567 69.875,77.379 v1(69.875,76.947) ; IC19.1@95.354,73.797 v1(95.354,74.899)
  L3 w0.127: v1(69.875,76.947) 70.469,76.354 70.469,75.905 70.173,75.609 70.173,75.407 70.316,75.264 71.468,75.264 71.503,75.299 94.334,75.299 94.734,74.899 v1(95.354,74.899)
CH1_A0: IC2B.4 IC19.2 | length 34.3
  Top w0.127: IC2B.4@68.775,67.567 68.775,66.458 68.825,66.408 69.754,66.408 v1(69.85,66.312) ; v1(96.004,72.695) IC19.2@96.004,73.797
  L3 w0.127: v1(69.85,66.312) 69.934,66.397 70.043,66.397 70.315,66.125 70.315,65.425 70.739,65.001 88.599,65.001 89.073,65.475 89.073,66.518 95.25,72.695 v1(96.004,72.695)
CH1_A1: IC2B.5 IC19.3 | length 35
  Top w0.127: IC2B.5@69.275,67.567 69.688,67.567 69.875,67.379 v1(69.875,66.947) ; IC19.3@96.654,73.797 v1(96.654,74.899)
  L3 w0.127: v1(69.875,66.947) 70.569,66.254 70.569,65.53 70.844,65.255 88.494,65.255 88.819,65.58 88.819,67.065 v1(96.654,74.899)
CH2_A0: IC2C.4 IC19.4 | length 45.3
  Top w0.127: IC2C.4@68.788,57.523 68.788,56.414 68.838,56.364 69.767,56.364 v1(69.863,56.269) ; v1(97.304,72.695) IC19.4@97.304,73.797
  L3 w0.127: v1@69.947,56.353 v1(69.863,56.269) 69.863,55.536 70.398,55.001 88.59,55.001 89.581,55.992 89.581,66.308 95.274,72.001 96.291,72.001 97.006,72.716 97.283,72.716 97.304,72.737 v1(97.304,72.695)
CH2_A1: IC2C.5 IC19.5 | length 46.3
  Top w0.127: IC2C.5@69.288,57.523 69.7,57.523 69.888,57.335 v1(69.888,56.904) ; IC19.5@97.954,73.797 v1(97.954,74.899)
  L3 w0.127: v1(69.888,56.904) 70.095,56.904 70.419,56.58 70.419,55.53 70.694,55.255 88.369,55.255 89.327,56.213 89.327,66.413 95.169,72.255 96.186,72.255 96.694,72.763 96.694,73.88 97.713,74.899 v1(97.954,74.899)
CH3_A0: IC2D.4 IC19.6 | length 56
  Top w0.127: IC2D.4@68.775,47.567 68.775,46.458 68.825,46.408 69.754,46.408 v1(69.85,46.312) ; v1(98.604,72.695) IC19.6@98.604,73.797
  L3 w0.127: v1@69.934,46.397 v1(69.85,46.312) 69.769,46.231 69.769,45.53 70.248,45.051 88.823,45.051 89.152,45.38 89.152,51.263 90.089,52.2 90.089,65.525 96.057,71.493 96.502,71.493 97.01,72.001 97.591,72.001 98.286,72.695 v1(98.604,72.695)
CH3_A1: IC2D.5 IC19.7 | length 57
  Top w0.127: IC2D.5@69.275,47.567 69.688,47.567 69.875,47.379 v1(69.875,46.947) ; IC19.7@99.254,73.797 v1(99.254,74.899)
  L3 w0.127: v1(69.875,46.947) 70.177,46.947 70.369,46.755 70.369,46.03 70.344,46.005 70.344,45.755 70.794,45.305 88.718,45.305 88.898,45.485 88.898,51.513 89.835,52.45 89.835,65.746 95.836,71.747 96.396,71.747 96.904,72.255 97.486,72.255 97.744,72.513 97.744,73.39 v1(99.254,74.899)
CH4_A0: IC2E.4 IC20.15 | length 57.1
  Top w0.127: IC2E.4@68.775,37.567 68.775,36.458 68.825,36.408 69.754,36.408 v1(69.85,36.312) ; v1(96.297,7.087) IC20.15@97.399,7.087
  L3 w0.127: v1@69.934,36.397 v1(69.85,36.312) 69.794,36.256 69.794,35.305 70.119,34.98 88.844,34.98 89.669,34.155 89.669,31.637 89.65,31.618 89.65,19.674 92.444,16.88 92.444,9.348 92.436,9.34 92.436,8.195 92.16,7.919 92.16,7.554 92.628,7.087 v1(96.297,7.087)
CH4_A1: IC2E.5 IC20.1 | length 51.9
  Top w0.127: IC2E.5@69.275,37.567 69.688,37.567 69.875,37.379 v1(69.875,36.947) ; IC20.1@91.499,7.737 v1(92.601,7.737)
  L3 w0.127: v1(69.875,36.947) 70.291,36.532 70.291,35.249 70.305,35.234 89.015,35.234 89.923,34.326 89.923,31.532 89.904,31.512 89.904,19.78 92.698,16.985 92.698,9.243 92.69,9.235 92.69,7.826 v1(92.601,7.737)
CH5_A0: IC2F.4 IC20.2 | length 42
  Top w0.127: IC2F.4@68.775,27.567 68.775,26.458 68.825,26.408 69.754,26.408 v1(69.85,26.312) ; v1(90.397,7.087) IC20.2@91.499,7.087
  L3 w0.127: v1@69.934,26.397 v1(69.85,26.312) 69.85,25.524 70.369,25.005 88.519,25.005 88.835,24.69 88.835,23.673 88.694,23.532 88.694,18.38 90.397,16.677 v1(90.397,7.087)
CH5_A1: IC2F.5 IC20.3 | length 43.3
  Top w0.127: IC2F.5@69.275,27.567 69.688,27.567 69.875,27.379 v1(69.875,26.947) ; IC20.3@91.499,6.437 v1(92.601,6.437)
  L3 w0.127: v1(69.875,26.947) 70.291,26.532 70.291,26.13 70.244,26.083 70.244,25.605 70.544,25.305 88.578,25.305 89.089,24.795 89.089,23.567 88.948,23.427 88.948,18.626 90.944,16.63 90.944,7.38 91.887,6.437 v1(92.601,6.437)
CH6_A0: IC2G.4 IC20.4 | length 33.6
  Top w0.127: IC2G.4@68.775,17.567 68.775,16.458 68.825,16.408 69.754,16.408 v1(69.85,16.312) ; v1(90.397,5.787) IC20.4@91.499,5.787
  L3 w0.127: v1@69.934,16.397 v1(69.85,16.312) 69.85,15.499 70.419,14.93 71.649,14.93 71.79,15.071 88.403,15.071 89.394,14.08 89.394,6.183 89.791,5.787 v1(90.397,5.787)
CH6_A1: IC2G.5 IC20.5 | length 34.8
  Top w0.127: IC2G.5@69.275,17.567 69.688,17.567 69.875,17.379 v1(69.875,16.947) ; IC20.5@91.499,5.137 v1(92.601,5.137)
  L3 w0.127: v1(69.875,16.947) 70.291,16.532 70.291,15.634 70.719,15.205 71.565,15.205 71.685,15.325 88.849,15.325 89.66,14.514 89.66,7.146 91.67,5.137 v1(92.601,5.137)
CH7_A0: IC2H.4 IC20.6 | length 25.4
  Top w0.127: IC2H.4@68.775,7.567 68.775,6.458 68.825,6.408 69.754,6.408 v1(69.85,6.312) ; v1(90.397,4.487) IC20.6@91.499,4.487
  L3 w0.127: v1@69.934,6.397 v1(69.85,6.312) 69.85,5.149 70.512,4.487 v1(90.397,4.487)
CH7_A1: IC2H.5 IC20.7 | length 27.1
  Top w0.127: IC2H.5@69.275,7.567 69.688,7.567 69.875,7.379 v1(69.875,6.947) ; IC20.7@91.499,3.837 v1(92.601,3.837)
  L3 w0.127: v1(69.875,6.947) 69.952,6.947 70.319,6.58 70.319,5.33 70.894,4.755 90.042,4.755 90.214,4.927 90.579,4.927 91.126,4.38 92.057,4.38 v1(92.601,3.837)
EEM0_I2C.SCL: D18.1 IC3.14 IC12.1 IC40.2 IC43.6 IC46.1 J1.27 | length 184.7
  Top w0.127: v1(107.789,7.45) IC3.14@107.789,8.78 ; IC40.2@134.305,43.25 134.305,20.556 142.201,12.66 142.201,8.75 ; IC43.6@140.03,8.785 v2@141.185,8.785 ; IC12.1@141.2,1.95 141.919,1.95 142.201,2.231 142.201,8.75 ; v2@141.22,8.75 v2@141.185,8.785 ; v2(141.371,8.75) 142.201,8.75 ; v2@141.371,8.785 v2@141.185,8.785 ; v2(169.575,14.909) 170.066,15.4 171.65,15.4 172.3,14.75 172.3,13.75 172.6,13.45 D18.1@173.4,13.45 175.15,13.45 v1(175.2,13.5) 176.9,13.5 186.89,23.49 J1.27@191.772,23.49 ; v2(179.9,0.125) 179.9,0.096 180.504,-0.508 IC46.1@181.631,-0.508
  L3 w0.127: v1(107.789,7.45) 107.789,7.41 108.031,7.168 126.967,7.168 127.904,6.231 134.389,6.231 136.909,8.75 v2(141.371,8.75) 149.439,8.75 153.693,13.004 168.729,13.004 169.575,13.85 v2(169.575,14.909) ; v1(175.2,13.5) 175.2,14.6 184.09,23.49 J1.27@191.772,23.49
  Bot w0.127: v1(175.2,13.5) 178.7,13.5 180.581,11.619 180.581,0.806 v2(179.9,0.125)
EEM0_I2C.SDA: D18.3 IC3.15 IC12.3 IC40.1 IC43.5 IC46.4 J1.26 | length 194.3
  Top w0.127: v1(106.519,7.45) IC3.15@106.519,8.78 ; IC40.1@133.655,43.25 133.655,20.293 141.371,12.577 v2@141.371,10.055 ; IC43.5@140.03,10.055 v2@141.185,10.055 ; v2@141.22,10.02 v2@141.185,10.055 ; v2(141.371,10.02) v2@141.371,10.055 ; v2(169.575,15.575) 169.9,15.9 171.55,15.9 172.7,14.75 D18.3@173.4,14.75 v2(174.7,14.75) 177.2,14.75 187.15,24.7 192.982,24.7 J1.26@194.312,26.03 ; v2(179.9,1.4) 179.942,1.442 IC46.4@181.631,1.442 ; v2@141.185,10.055 v2@141.371,10.055
  Top w0.203: v2(140.2,0.05) IC12.3@141.2,0.05
  L3 w0.127: v1(106.519,7.45) 107.264,8.195 116.914,8.195 117.658,7.45 127.238,7.45 128.173,6.515 131.142,6.515 134.264,6.515 137.769,10.02 v2(141.371,10.02) 149.77,10.02 153.125,13.376 168.476,13.376 169.078,13.978 169.078,15.078 v2(169.575,15.575) ; v2(174.7,14.75) 184.65,24.7 192.982,24.7 J1.26@194.312,26.03
  Bot w0.127: v2(174.7,14.75) 174.7,13.1 175,12.8 178.8,12.8 179.9,11.7 v2(179.9,1.4)
  Bot w0.203: v2(140.2,0.05) 141.25,0.05 142.4,1.2 142.4,8.991 v2(141.371,10.02)
EEM_IO.LVDS_N5: IC9.4 J1.18 R18.1 R143.2 | length 54
  Top w0.152: IC9.4@161.45,24.3 161.45,23.324 161.622,23.152 162.232,23.152 R18.1@162.55,23.47 162.868,23.152 163.423,23.152 164.875,21.7 170.175,21.7 170.905,22.43 177.755,22.43 184.7,29.375 184.7,36.35 185.952,37.602 192.899,37.602 193.195,37.307 193.195,36.781 193.785,36.19 J1.18@194.312,36.19
  Bot w0.152: J1.18@194.312,36.19 193.504,36.19 193.195,36.5 193.195,37.01 193.482,37.298 198.417,37.298 R143.2@198.815,36.9
EEM_IO.LVDS_N6: IC10.3 J1.21 R144.2 | length 42.1
  Top w0.152: IC10.3@166.95,16.7 166.95,17.648 167.15,17.848 176.148,17.848 188.374,30.074 188.7,30.4 190.5,32.2 192.862,32.2 J1.21@191.772,31.11
  Bot w0.152: J1.21@191.772,31.11 192.86,32.198 198.432,32.198 R144.2@198.83,31.8
EEM_IO.LVDS_N7: IC11.4 J1.24 R19.1 R145.2 | length 49.3
  Top w0.152: IC11.4@161.45,16.33 IC11.4@161.45,16.3 161.45,15.48 161.748,15.182 162.682,15.182 R19.1@163,15.5 ; R19.1@163,15.47 163.318,15.152 163.726,15.152 164.679,14.2 166.444,14.2 169.244,17 176.972,17 189.838,29.866 193.017,29.866 J1.24@194.312,28.57
  Bot w0.152: J1.24@194.312,28.57 193.388,28.57 193.195,28.763 193.195,29.484 193.409,29.698 198.432,29.698 R145.2@198.83,29.3
EEM_IO.LVDS_N8: IC13.5 J2.3 R146.2 | length 24.5
  Top w0.152: IC13.5@166.75,61.55 166.75,62.051 166.652,62.149 166.652,63 166.952,63.3 168.1,63.3 169.152,62.248 169.152,57.317 171.374,55.095 174.101,55.095 J2.3@173.002,53.996
  Bot w0.152: J2.3@173.002,53.996 174.124,55.118 179.512,55.118 R146.2@179.93,54.7
EEM_IO.LVDS_N9: IC14.5 J2.6 R147.2 | length 25.8
  Top w0.152: IC14.5@161.25,56.05 161.25,55.549 161.152,55.451 161.152,55.001 161.421,54.732 162.432,54.732 163.455,55.755 168.294,55.755 171.198,52.85 173.988,52.85 174.424,52.414 174.424,51.814 174.782,51.456 J2.6@175.542,51.456
  Bot w0.152: J2.6@175.542,51.456 174.558,51.456 174.424,51.59 174.424,52.21 174.825,52.61 179.52,52.61 R147.2@179.93,52.2
EEM_IO.LVDS_N10: IC15.5 J2.9 R148.2 | length 25.8
  Top w0.152: IC15.5@161.25,47.55 161.176,47.476 161.176,47.136 161.153,47.112 161.153,46.896 161.153,46.694 161.31,46.536 169.495,46.536 170.781,45.25 173.789,45.25 174.095,45.556 174.095,47.038 174.316,47.259 174.316,47.386 174.227,47.475 174.101,47.475 J2.9@173.002,46.376
  Bot w0.152: J2.9@173.002,46.376 174.124,47.498 179.532,47.498 R148.2@179.93,47.1
EEM_IO.LVDS_N11: IC16.5 J2.12 R149.2 | length 20.3
  Top w0.152: IC16.5@166.75,43.55 166.677,43.624 166.677,43.964 166.653,43.988 166.653,44.853 166.9,45.1 167.769,45.1 170.424,42.445 173.497,42.445 174.424,43.372 174.424,43.747 174.513,43.836 J2.12@175.542,43.836
  Bot w0.152: R149.2@168.614,42 169.061,42.448 173.951,42.448 174.424,42.921 174.424,43.578 174.682,43.836 J2.12@175.542,43.836
EEM_IO.LVDS_N12: IC17.5 J2.15 R150.2 | length 24.9
  Top w0.152: IC17.5@161.298,39.502 IC17.5@161.25,39.55 161.177,39.476 161.177,39.135 161.153,39.112 161.153,38.578 162.031,37.7 173.8,37.7 174.119,38.019 174.119,39.569 174.03,39.658 173.904,39.658 J2.15@173.002,38.756
  Bot w0.152: R150.2@168.614,39.452 169.041,39.879 174.125,39.879 J2.15@173.002,38.756
EEM_IO.LVDS_N13: J2.18
EEM_IO.LVDS_N14: J2.21
EEM_IO.LVDS_N15: J2.24 R153.2 | length 7.8
  Bot w0.152: J2.24@175.542,28.596 174.592,28.596 174.424,28.428 174.424,27.728 174.7,27.452 179.582,27.452 R153.2@180.03,27.9
EEM_IO.LVDS_P5: IC9.3 J1.17 R18.2 R127.2 | length 54
  Top w0.152: IC9.3@161.45,21.7 161.45,22.644 161.654,22.848 162.232,22.848 R18.2@162.55,22.53 162.868,22.848 163.296,22.848 164.749,21.395 170.301,21.395 171.031,22.125 177.881,22.125 185.005,29.249 185.005,36.224 186.079,37.298 192.773,37.298 192.89,37.181 192.89,36.781 192.3,36.19 J1.17@191.772,36.19
  Bot w0.152: J1.17@191.772,36.19 192.58,36.19 192.89,36.5 192.89,37.136 193.356,37.602 198.417,37.602 R127.2@198.815,38
EEM_IO.LVDS_P6: IC10.4 J1.20 R128.2 | length 42.3
  Top w0.152: IC10.4@166.95,19.3 166.95,18.352 167.15,18.152 176.021,18.152 188.069,30.2 190.374,32.505 193.167,32.505 J1.20@194.312,33.65
  Bot w0.152: J1.20@194.312,33.65 193.164,32.502 198.432,32.502 R128.2@198.83,32.9
EEM_IO.LVDS_P7: IC11.3 J1.23 R19.2 R129.2 | length 49.1
  Top w0.152: IC11.3@161.45,13.73 161.45,14.674 161.654,14.878 162.682,14.878 R19.2@163,14.56 ; R19.2@163,14.53 163.318,14.848 163.6,14.848 164.552,13.895 166.57,13.895 167.297,14.622 167.678,15.003 169.37,16.695 177.098,16.695 189.964,29.561 192.363,29.561 192.696,29.228 192.696,29.102 192.164,28.57 J1.23@191.772,28.57
  Bot w0.152: J1.23@191.772,28.57 192.697,28.57 192.89,28.763 192.89,29.61 193.282,30.002 198.432,30.002 R129.2@198.83,30.4
EEM_IO.LVDS_P8: IC13.6 J2.2 R130.2 | length 25
  Top w0.152: IC13.6@166.25,61.55 166.25,62.051 166.348,62.149 166.348,63.126 166.826,63.605 168.226,63.605 169.457,62.374 169.457,57.443 171.463,55.437 174.443,55.437 J2.2@175.542,56.536
  Bot w0.152: J2.2@175.542,56.536 174.429,55.423 179.553,55.423 R130.2@179.93,55.8
EEM_IO.LVDS_P9: IC14.6 J2.5 R131.2 | length 26.3
  Top w0.152: IC14.6@160.75,56.05 160.75,55.549 160.847,55.451 160.847,54.875 161.295,54.427 162.558,54.427 163.581,55.45 168.167,55.45 170.942,52.675 171.072,52.545 173.862,52.545 174.119,52.287 174.119,51.814 173.761,51.456 J2.5@173.002,51.456
  Bot w0.152: J2.5@173.002,51.456 173.985,51.456 174.119,51.59 174.119,52.336 174.698,52.915 179.545,52.915 R131.2@179.93,53.3
EEM_IO.LVDS_P10: IC15.6 J2.8 R132.2 | length 27
  Top w0.152: IC15.6@160.75,47.757 IC15.6@160.75,47.55 160.824,47.476 160.824,47.136 160.848,47.112 160.848,46.77 160.848,46.567 160.99,46.425 161.184,46.231 169.369,46.231 170.655,44.945 173.916,44.945 174.4,45.43 174.4,46.912 174.621,47.133 174.621,47.512 174.443,47.69 174.443,47.817 J2.8@175.542,48.916
  Bot w0.152: J2.8@175.542,48.916 174.428,47.802 179.532,47.802 R132.2@179.93,48.2
EEM_IO.LVDS_P11: IC16.6 J2.11 R133.2 | length 19.8
  Top w0.152: IC16.6@166.25,43.55 166.324,43.624 166.324,43.964 166.348,43.988 166.348,44.979 166.774,45.405 167.895,45.405 169.288,44.012 170.55,42.75 173.371,42.75 174.119,43.499 174.119,43.747 174.03,43.836 J2.11@173.002,43.836
  Bot w0.152: R133.2@168.614,43.2 169.061,42.752 173.824,42.752 174.119,43.047 174.119,43.578 173.862,43.836 J2.11@173.002,43.836
EEM_IO.LVDS_P12: IC17.6 J2.14 R134.2 | length 26.9
  Top w0.152: IC17.6@160.75,39.636 IC17.6@160.75,39.55 160.824,39.476 160.824,39.135 160.848,39.112 160.848,38.452 161.904,37.395 173.926,37.395 174.424,37.893 174.424,40.178 J2.14@175.542,41.296
  Bot w0.152: R134.2@168.614,40.552 168.981,40.184 174.43,40.184 J2.14@175.542,41.296
EEM_IO.LVDS_P13: J2.17
EEM_IO.LVDS_P14: J2.20
EEM_IO.LVDS_P15: J2.23 R137.2 | length 8.3
  Bot w0.152: J2.23@173.002,28.596 173.952,28.596 174.119,28.428 174.119,27.602 174.574,27.148 179.2,27.148 179.582,27.148 R137.2@180.03,26.7
GA0: IC37.6 IC37.8 R90.1 R108.1 R109.2 R112.1 | length 23.5
  Top w0.127: R112.1@174.6,11.75 R108.1@174.6,10.65 175.658,10.65 176.001,10.307 IC37.8@176.001,9.725 178.286,9.725 178.936,9.075 IC37.6@181.801,9.075 R109.2@183.131,9.075 183.16,9.104 v2(183.16,9.934) ; v2(185.807,0.66) 185.807,0.561 186.018,0.35 R90.1@186.46,0.35
  Bot w0.127: v2(183.16,9.934) 184.235,8.859 184.235,0.946 184.521,0.66 v2(185.807,0.66)
GA1: IC37.12 R91.1 R107.2 | length 13.7
  Top w0.127: IC37.12@176.001,7.125 178.955,7.125 181.43,4.65 R107.2@183.16,4.65 183.16,4.125 183.335,3.95 185.116,3.95 186.46,2.606 R91.1@186.46,1.55
GA2: IC37.13 R94.1 R104.2 | length 14.5
  Top w0.127: IC37.13@176.001,6.475 179.057,6.475 181.382,4.15 182.698,4.15 183.015,3.833 183.273,3.575 183.898,2.95 v2(185.147,2.95) ; v2(186.73,3.95) R94.1@187.36,3.95
  Top w0.381: R104.2@187.36,2.95 R94.1@187.36,3.95
  L3 w0.127: v2(185.147,2.95) 186.15,2.95 186.73,3.53 v2(186.73,3.95)
GA3: R99.1